# Altium PCB GALX4-0047N_PCB-1109N_REV-A_Panel.PcbDoc
Units mil, origin at the board's own origin, x right, y up, seen from the top; angles counter-clockwise.
Board outline 8800 x 8750 mil, 2 copper layers (Top Layer, Bottom Layer); 3 components, 0 nets, 12 pads, 0 vias.
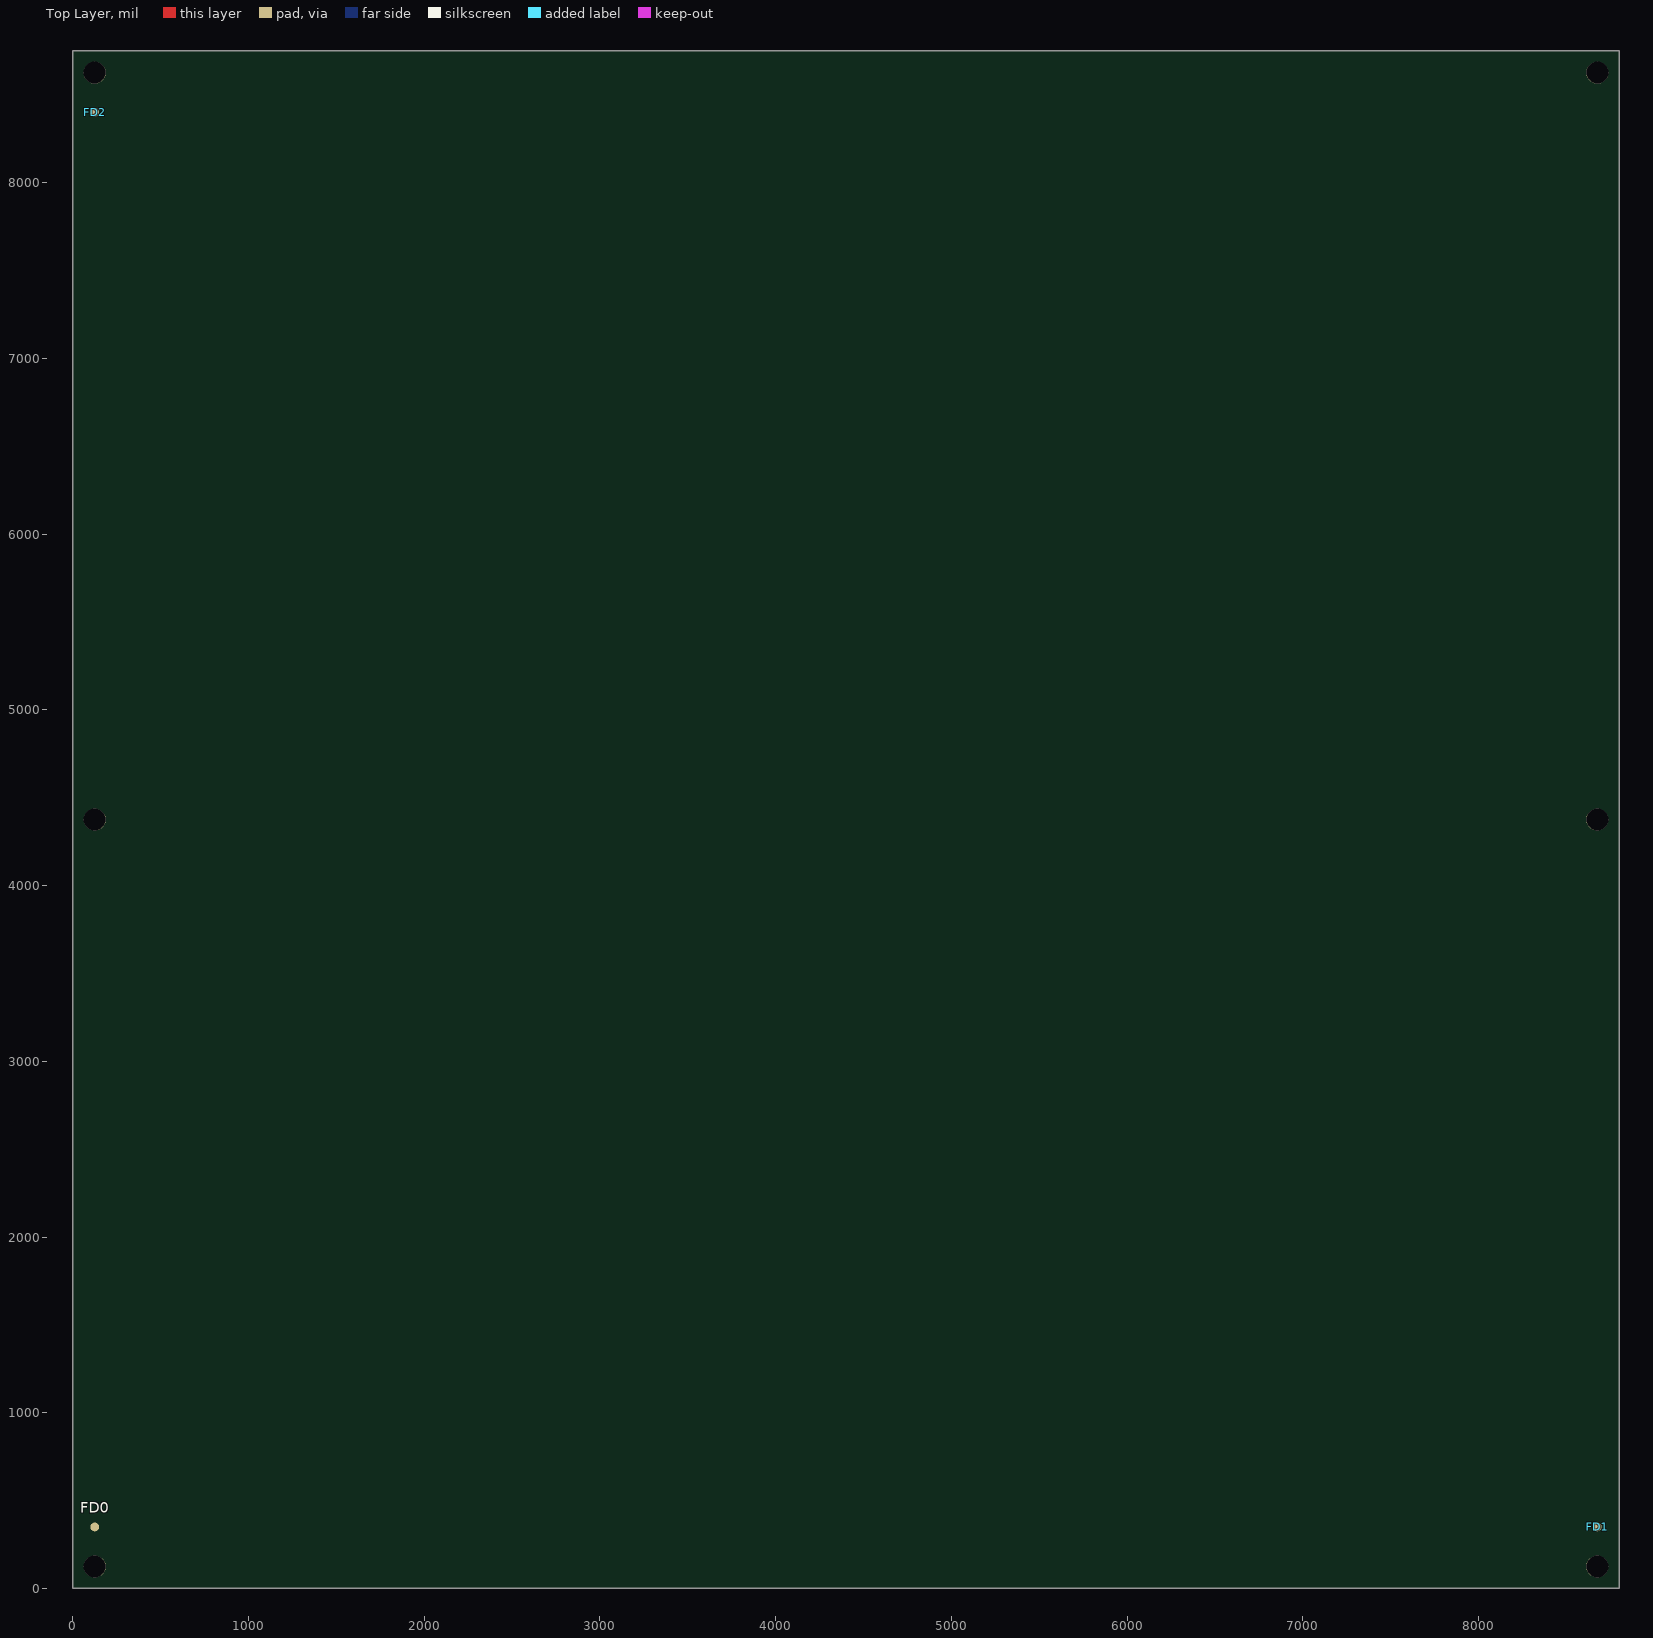
[diagram p0: Top Layer view]
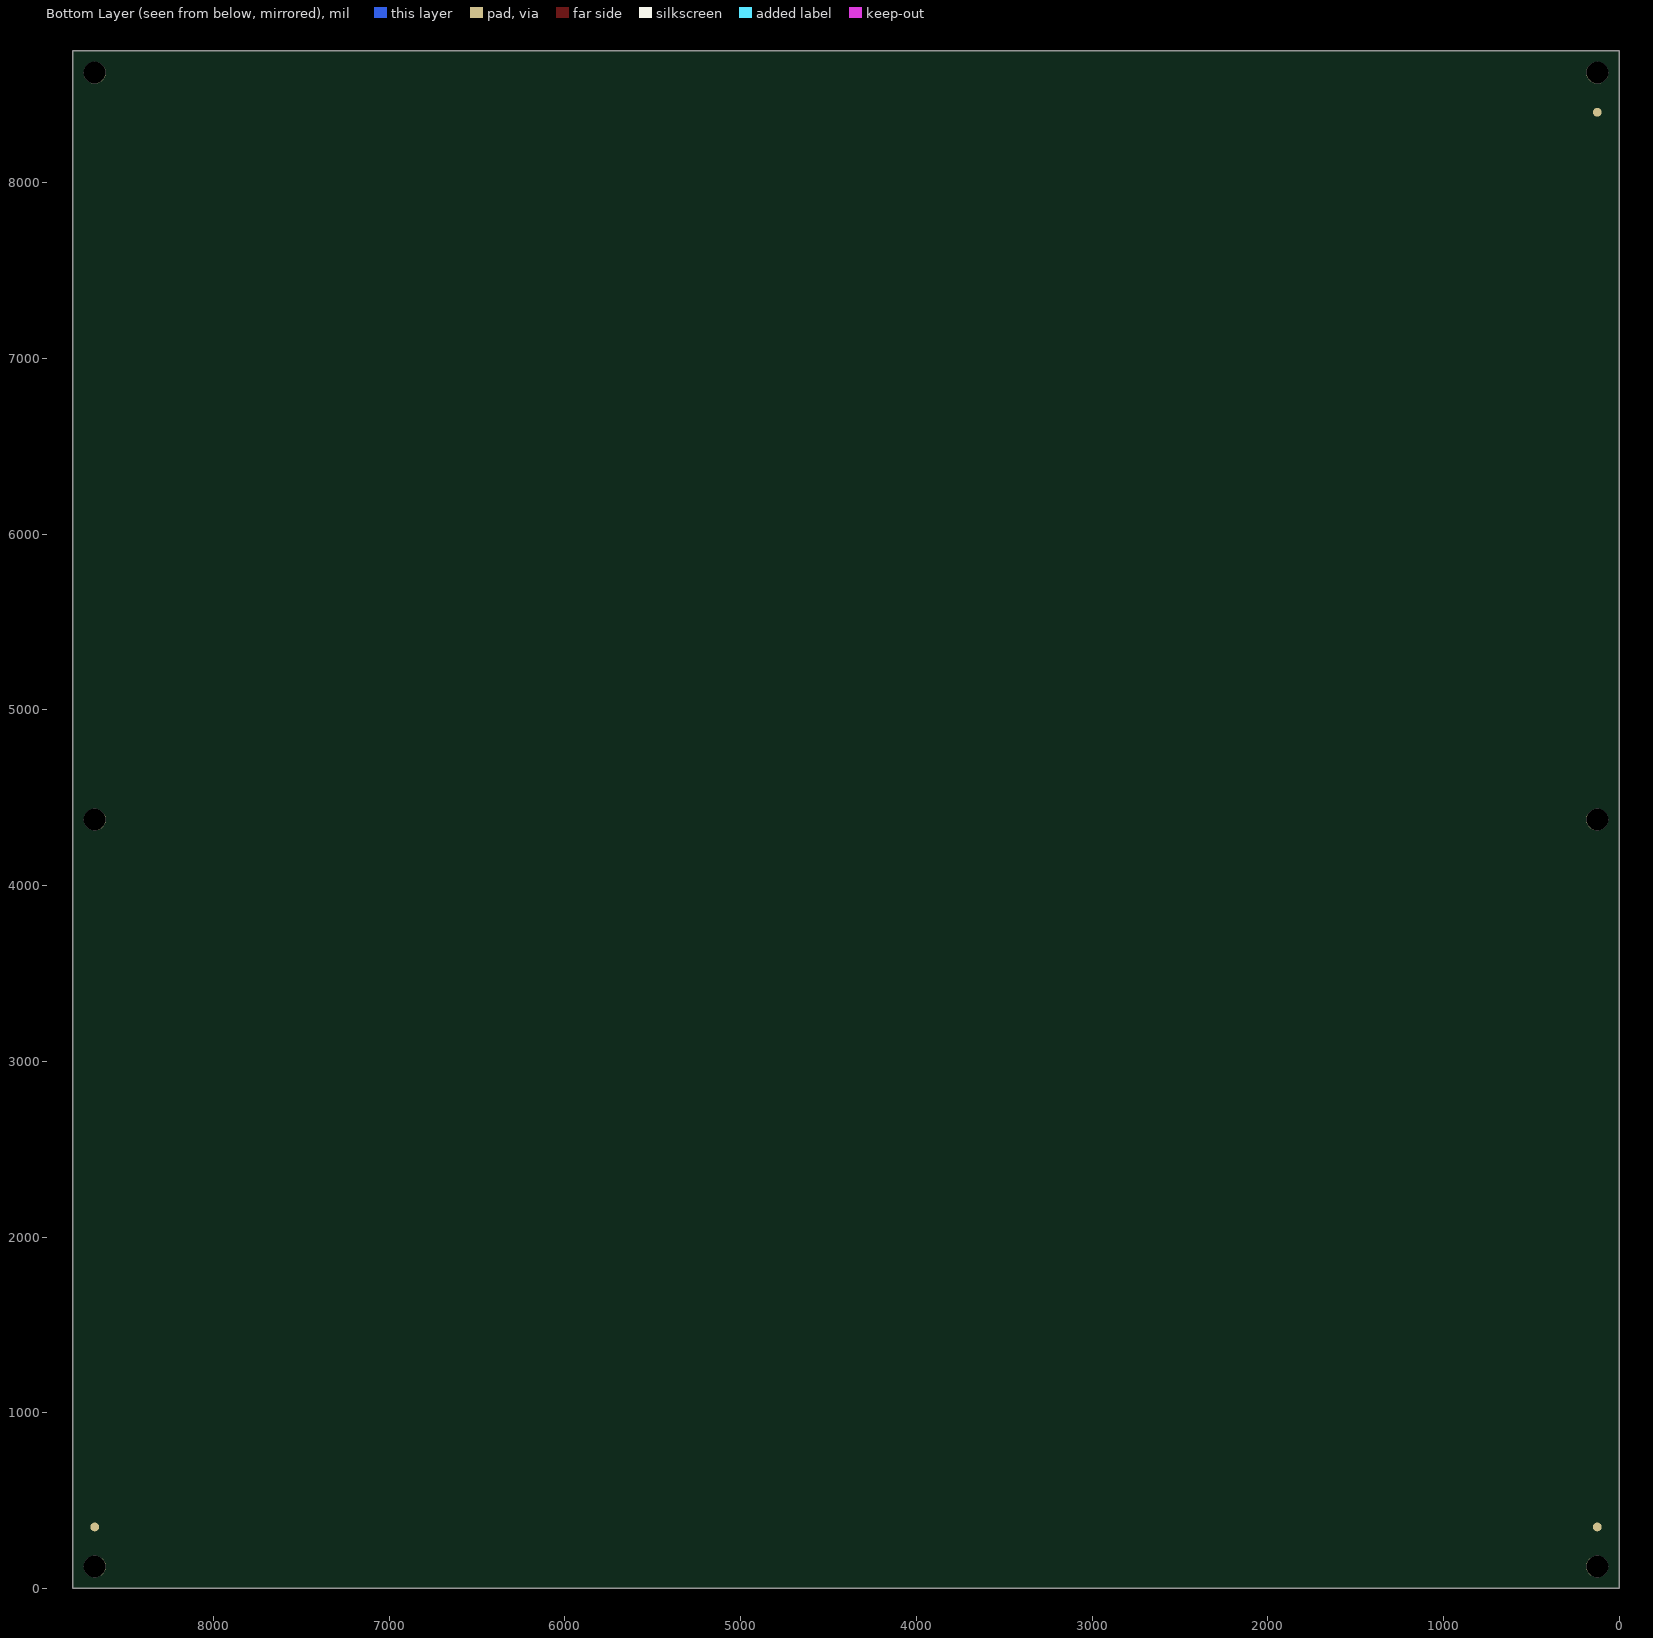
[diagram p1: Bottom Layer view, seen from below]

## Layer stack, top to bottom
Top Solder: solder mask 0.4, Solder Resist, Dk 3.5
Top Layer: signal copper 1.4
Dielectric 1: dielectric 12.6, FR-4, Dk 4.8
Bottom Layer: signal copper 1.4
Bottom Solder: solder mask 0.4, Solder Resist, Dk 3.5

## Board outline
0,0 8800,0 8800,8750 0,8750

## Design rules (kind name [scope] priority, off if disabled: settings)
Clearance [All] p1: gap=10
PolygonConnect [All] p1: connectstyle=Relief reliefconductorwidth=10 reliefentries=4 polygonreliefangle="90 Angle" airgapwidth=10
RoutingVias [All] p1: holewidth=28 width=50 viastyle="Through Hole" minholewidth=28 minwidth=50 maxholewidth=28 maxwidth=50
SolderMaskExpansion [All] p1: expansion=4
UnpouredPolygon [All] p1: allowunpoured=FALSE
Width [All] p1: maxlimit=10 minlimit=10 preferedwidth=10
29 further rules are at their usual default settings.

## Components (designator, comment, footprint, x,y, rotation, side; value= is the part's Value field where it differs from the comment)
FD0 "FIDUCIAL-50MIL" FIDUCIAL-50MIL 125,350 r0 top
FD1 "FIDUCIAL-50MIL" FIDUCIAL-50MIL 8675,350 r0 top
FD2 "FIDUCIAL-50MIL" FIDUCIAL-50MIL 125,8400 r180 top (schematic designator FD1)

## Footprints (in the part's own frame and the unit in brackets; to place one, negate y for a bottom-side part, rotate by r counter-clockwise, add the part's x,y. Pads: shape width x height; smd on the part's side, far side on the other; paste and mask are expansions set on the pad)
FIDUCIAL-50MIL [mil]
  round 50 smd paste-1000 mask+25: FD(0,0)
  round 50 smd far side paste-1000 mask+25: FD(0,0)
  Top Layer pour cut-out: 0,55 40,40 55,0 40,-40 0,-55 -40,-40 -55,0 -40,40
  Bottom Layer pour cut-out: 0,55 40,40 55,0 40,-40 0,-55 -40,-40 -55,0 -40,40

## Free pads (board coordinates)
  round 125 hole 125 unplated: 0(125,125) 0(125,4375) 0(125,8625) 0(8675,125) 0(8675,4375) 0(8675,8625)

## Nets (pads, with @x,y where several pads share a name; then routed paths per layer and width w, separated by ;. In a path a pad name is that pad's centre, name@x,y a point inside that pad or via, vN(x,y) a via of type N, cw(c..) or ccw(c..) an arc to the next point about the centre after c; other vN are vias at no path point)
pads on no net: FD0.FD FD1.FD FD2.FD

## Silkscreen, mask and mechanical layers (free items; w line width, h text height)
Mechanical 1:
  the board outline again, w8
Mechanical 5:
  lines w1: 10305,6028 10305,4128 13905,4128 13905,6228 ; 12005,4128 12005,6228 ; 13905,4452 10305,4452 10305,4752 13905,4752 13905,5052 10305,5052 10305,5352 13905,5352 13905,5652 10305,5652 10305,5952 ; 13905,5952 10305,5952 ; 13905,6252 10305,6252 10305,5952
  text "24V AC/DC I/O EXPANDER" at 10315,7126 h180
  text "GALX4-0047N REV: A" at 10315,6926 h180
  text "PCB-1109N" at 10315,6726 h180
  text "ST-1099N" at 10314,6549 h180
  text "03/16/16" at 10320,6322 h180
  text "FABRICATION SPECIFICATION" at 10417.5,6064 h76
  text "IPC-A-600 CLASS II" at 12117.5,6064 h76
  text "BOARD DIMENSIONS" at 10417.5,5764 h76
  text "3.900W x 7.750\"H x 0.062\"T" at 12117.5,5764 h76
  text "COPPER THICKNESS" at 10417.5,5464 h76
  text "2 OUNCE" at 12117.5,5464 h76
  text "NUMBER OF LAYERS" at 10417.5,5164 h76
  text "2 W/ P.T.H." at 12117.5,5164 h76
  text "SOLDER MASK" at 10417.5,4864 h76
  text "GREEN LPI OVER COPPER" at 12117.5,4864 h76
  text "SILK SCREEN" at 10417.5,4564 h76
  text "WHITE NON-CONDUCTIVE" at 12117.5,4564 h76
  text "2 boards per panel" at 12109.5,4290 h120
  text "Pannel Dimensions" at 10426.5,4275 h120
Drill Drawing:
  text ".Legend" at 10405,1480 h60

## Dimensions
8800,0 to 8800,8750 on Mechanical 1
0,0 to 8800,0 on Mechanical 1

## Panel: embedded boards
"R:\WorkSpace\GALX4-0047N\GALX4-0047N_PCB-1109N_REV-A.PcbDoc" at 500,500, 1 rows x 2 columns, spacing 7750 x 3900, rotation 0